# EAGLE board p8x-bustest-card (EAGLE 9.6.2)

Size 160 x 100 mm. Coordinates in mm from the lower left corner, seen from the top.
Outline: 0,0 160,0 160,100 0,100 0,0
Copper layers (1*2*15*16): Top / Route2 / Route15 / Bottom

## Footprints (pad centres in the part's own frame; a part is rotated, then mirrored left to right if it is on the bottom)
PICO40 = drill 0.813 pad 1.6: 1 0,0; 2 0,-2.54; 3 0,-5.08; 4 0,-7.62; 5 0,-10.16; 6 0,-12.7; 7 0,-15.24; 8 0,-17.78; 9 0,-20.32; 10 0,-22.86; 11 0,-25.4; 12 0,-27.94; 13 0,-30.48; 14 0,-33.02; 15 0,-35.56; 16 0,-38.1; 17 0,-40.64; 18 0,-43.18; 19 0,-45.72; 20 0,-48.26; 21 17.78,-48.26; 22 17.78,-45.72; 23 17.78,-43.18; 24 17.78,-40.64; 25 17.78,-38.1; 26 17.78,-35.56; 27 17.78,-33.02; 28 17.78,-30.48; 29 17.78,-27.94; 30 17.78,-25.4; 31 17.78,-22.86; 32 17.78,-20.32; 33 17.78,-17.78; 34 17.78,-15.24; 35 17.78,-12.7; 36 17.78,-10.16; 37 17.78,-7.62; 38 17.78,-5.08; 39 17.78,-2.54; 40 17.78,0
C_DISC1 = drill 0.9 pad 1.8: 1 0,0; 2 0,-2.54
LED5 = drill 0.9 pad 1.8: 1 2.54,0; 2 0,0
MABC96R = drill 0.914 pad 1.524: A1 -2.54,39.37; A2 -2.54,36.83; A3 -2.54,34.29; A4 -2.54,31.75; A5 -2.54,29.21; A6 -2.54,26.67; A7 -2.54,24.13; A8 -2.54,21.59; A9 -2.54,19.05; A10 -2.54,16.51; A11 -2.54,13.97; A12 -2.54,11.43; A13 -2.54,8.89; A14 -2.54,6.35; A15 -2.54,3.81; A16 -2.54,1.27; A17 -2.54,-1.27; A18 -2.54,-3.81; A19 -2.54,-6.35; A20 -2.54,-8.89; A21 -2.54,-11.43; A22 -2.54,-13.97; A23 -2.54,-16.51; A24 -2.54,-19.05; A25 -2.54,-21.59; A26 -2.54,-24.13; A27 -2.54,-26.67; A28 -2.54,-29.21; A29 -2.54,-31.75; A30 -2.54,-34.29; A31 -2.54,-36.83; A32 -2.54,-39.37; B1 0,39.37; B2 0,36.83; B3 0,34.29; B4 0,31.75; B5 0,29.21; B6 0,26.67; B7 0,24.13; B8 0,21.59; B9 0,19.05; B10 0,16.51; B11 0,13.97; B12 0,11.43; B13 0,8.89; B14 0,6.35; B15 0,3.81; B16 0,1.27; B17 0,-1.27; B18 0,-3.81; B19 0,-6.35; B20 0,-8.89; B21 0,-11.43; B22 0,-13.97; B23 0,-16.51; B24 0,-19.05; B25 0,-21.59; B26 0,-24.13; B27 0,-26.67; B28 0,-29.21; B29 0,-31.75; B30 0,-34.29; B31 0,-36.83; B32 0,-39.37; C1 2.54,39.37; C2 2.54,36.83; C3 2.54,34.29; C4 2.54,31.75; C5 2.54,29.21; C6 2.54,26.67; C7 2.54,24.13; C8 2.54,21.59; C9 2.54,19.05; C10 2.54,16.51; C11 2.54,13.97; C12 2.54,11.43; C13 2.54,8.89; C14 2.54,6.35; C15 2.54,3.81; C16 2.54,1.27; C17 2.54,-1.27; C18 2.54,-3.81; C19 2.54,-6.35; C20 2.54,-8.89; C21 2.54,-11.43; C22 2.54,-13.97; C23 2.54,-16.51; C24 2.54,-19.05; C25 2.54,-21.59; C26 2.54,-24.13; C27 2.54,-26.67; C28 2.54,-29.21; C29 2.54,-31.75; C30 2.54,-34.29; C31 2.54,-36.83; C32 2.54,-39.37 | hole 2.794: -0.3,45; -0.3,-45
HDR10 = drill 0.9 pad 1.7: 1 0,0; 2 2.54,0; 3 0,-2.54; 4 2.54,-2.54; 5 0,-5.08; 6 2.54,-5.08; 7 0,-7.62; 8 2.54,-7.62; 9 0,-10.16; 10 2.54,-10.16
R_AXIAL = drill 0.8 pad 1.6: 1 0,0; 2 10.16,0
DIP16 = drill 0.813 pad 1.6: 1 0,0; 2 0,-2.54; 3 0,-5.08; 4 0,-7.62; 5 0,-10.16; 6 0,-12.7; 7 0,-15.24; 8 0,-17.78; 9 7.62,-17.78; 10 7.62,-15.24; 11 7.62,-12.7; 12 7.62,-10.16; 13 7.62,-7.62; 14 7.62,-5.08; 15 7.62,-2.54; 16 7.62,0
DIP28N = drill 0.813 pad 1.6: 1 0,0; 2 0,-2.54; 3 0,-5.08; 4 0,-7.62; 5 0,-10.16; 6 0,-12.7; 7 0,-15.24; 8 0,-17.78; 9 0,-20.32; 10 0,-22.86; 11 0,-25.4; 12 0,-27.94; 13 0,-30.48; 14 0,-33.02; 15 7.62,-33.02; 16 7.62,-30.48; 17 7.62,-27.94; 18 7.62,-25.4; 19 7.62,-22.86; 20 7.62,-20.32; 21 7.62,-17.78; 22 7.62,-15.24; 23 7.62,-12.7; 24 7.62,-10.16; 25 7.62,-7.62; 26 7.62,-5.08; 27 7.62,-2.54; 28 7.62,0
DIP20 = drill 0.813 pad 1.6: 1 0,0; 2 0,-2.54; 3 0,-5.08; 4 0,-7.62; 5 0,-10.16; 6 0,-12.7; 7 0,-15.24; 8 0,-17.78; 9 0,-20.32; 10 0,-22.86; 11 7.62,-22.86; 12 7.62,-20.32; 13 7.62,-17.78; 14 7.62,-15.24; 15 7.62,-12.7; 16 7.62,-10.16; 17 7.62,-7.62; 18 7.62,-5.08; 19 7.62,-2.54; 20 7.62,0

## Placement (x,y rotation side)
A1  RP2040  [PICO40]  316.81,95.2 0 top  (outside the outline)
C1  100nF  [C_DISC1]  215.19,95.1 0 top  (outside the outline)
C2  100nF  [C_DISC1]  231.41,95.1 0 top  (outside the outline)
C3  100nF  [C_DISC1]  247.63,95.1 0 top  (outside the outline)
C4  100nF  [C_DISC1]  263.85,95.1 0 top  (outside the outline)
C5  100nF  [C_DISC1]  280.07,95.1 0 top  (outside the outline)
C6  100nF  [C_DISC1]  296.29,95.1 0 top  (outside the outline)
C7  100nF  [C_DISC1]  312.51,95.1 0 top  (outside the outline)
D1  SCHOTTKY  [LED5]  210.21,42.64 0 top  (outside the outline)
J1  MABC96R  [MABC96R]  193.34,49.6 0 top  (outside the outline)
J2  PROBE  [HDR10]  203.32,42.69 0 top  (outside the outline)
LED1  PRB0  [LED5]  20,88 0 top
LED2  PRB1  [LED5]  37,88 0 top
LED3  PRB2  [LED5]  54,88 0 top
LED4  PRB3  [LED5]  71,88 0 top
LED5  PRB4  [LED5]  88,88 0 top
LED6  PRB5  [LED5]  105,88 0 top
LED7  PRB6  [LED5]  122,88 0 top
LED8  PRB7  [LED5]  139,88 0 top
LED9  5V  [LED5]  20,76 0 top
LED10  ARM  [LED5]  37,76 0 top
LED11  LIS  [LED5]  54,76 0 top
LED12  CLK  [LED5]  71,76 0 top
LED13  CKB  [LED5]  88,76 0 top
LED14  RES  [LED5]  105,76 0 top
LED15  ERR  [LED5]  122,76 0 top
LED16  USB  [LED5]  139,76 0 top
R5  10K  [R_AXIAL]  217.05,42.74 0 top  (outside the outline)
R6  10K  [R_AXIAL]  231.41,42.74 0 top  (outside the outline)
R7  1K8  [R_AXIAL]  245.77,42.74 0 top  (outside the outline)
R8  3K3  [R_AXIAL]  260.13,42.74 0 top  (outside the outline)
RN1  8x330R  [DIP16]  274.49,42.74 0 top  (outside the outline)
RN2  8x330R  [DIP16]  286.31,42.74 0 top  (outside the outline)
RN3  8x1K  [DIP16]  298.13,42.74 0 top  (outside the outline)
U1  MCP23S17  [DIP28N]  203.27,95.2 0 top  (outside the outline)
U2  MCP23S17  [DIP28N]  219.49,95.2 0 top  (outside the outline)
U3  MCP23S17  [DIP28N]  235.71,95.2 0 top  (outside the outline)
U4  MCP23S17  [DIP28N]  251.93,95.2 0 top  (outside the outline)
U5  MCP23S17  [DIP28N]  268.15,95.2 0 top  (outside the outline)
U6  74HCT244  [DIP20]  284.37,95.2 0 top  (outside the outline)
U7  74HCT244  [DIP20]  300.59,95.2 0 top  (outside the outline)

## Library data of the parts
A1 C1-C7 D1 J1 J2 LED1-LED16 R5-R8 RN1-RN3 U1-U7 = p8x

## Nets
-IRQ: U4.27
-RES: J1.A11 U3.28
A0: J1.C3 U1.1
A1: J1.C4 U1.2
A2: J1.C5 U1.3
A3: J1.C6 U1.4
A4: J1.C7 U1.5
A5: J1.C8 U1.6
A6: J1.C9 U1.7
A7: J1.C10 U1.8
A8: J1.C11 U2.21
A9: J1.C12 U2.22
A10: J1.C13 U2.23
A11: J1.C14 U2.24
A12: J1.C15 U2.25
A13: J1.C16 U2.26
A14: J1.C17 U2.27
A15: J1.C18 U2.28
ALUM: J1.C23 U3.5
ALUS0: J1.C19 U3.1
ALUS1: J1.C20 U3.2
ALUS2: J1.C21 U3.3
ALUS3: J1.C22 U3.4
BSEL: J1.B28 U4.25
CIN: J1.C24 U3.6
CLK: J1.A24 U3.26
CLKB: J1.A25 U3.27
CLRC: J1.B27 U4.24
CS5: U1.11 U2.11 U3.11 U4.11 U5.11 U6.14
D0: J1.A3 U1.21
D1: J1.A4 U1.22
D2: J1.A5 U1.23
D3: J1.A6 U1.24
D4: J1.A7 U1.25
D5: J1.A8 U1.26
D6: J1.A9 U1.27
D7: J1.A10 U1.28
DLD0: J1.A16 U2.5
DLD1: J1.A17 U2.6
DLD2: J1.A18 U2.7
DLD3: J1.A19 U2.8
DOE0: J1.A12 U2.1
DOE1: J1.A13 U2.2
DOE2: J1.A14 U2.3
DOE3: J1.A15 U2.4
FC: J1.A27 U4.1
FN: J1.A29 U4.3
FV: J1.A30 U4.4
FZ: J1.A28 U4.2
GND: A1.3 A1.33 C1.2 C2.2 C3.2 C4.2 C5.2 C6.2 C7.2 J1.A31 J1.A32 J1.B3 J1.B5 J1.B7 J1.B9 J1.B11 J1.B13 J1.B15 J1.B17 J1.B19 J1.B21 J1.B23 J1.B25 J1.B31 J1.B32 J1.C31 J1.C32 J2.9 J2.10 LED1.1 LED2.1 LED3.1 LED4.1 LED5.1 LED6.1 LED7.1 LED8.1 LED9.1 LED10.1 LED11.1 LED12.1 LED13.1 LED14.1 LED15.1 LED16.1 R6.2 R8.2 U1.10 U1.15 U1.16 U1.17 U1.19 U1.20 U2.10 U2.16 U2.17 U2.19 U2.20 U3.10 U3.15 U3.17 U3.19 U3.20 U4.10 U4.17 U4.19 U4.20 U5.10 U5.15 U5.16 U5.19 U5.20 U6.1 U6.10 U6.11 U6.13 U6.15 U6.17 U6.19 U7.1 U7.10 U7.19
L_PR0: RN1.1 U7.18
L_PR1: RN1.2 U7.16
L_PR2: RN1.3 U7.14
L_PR3: RN1.4 U7.12
L_PR4: RN1.5 U7.9
L_PR5: RN1.6 U7.7
L_PR6: RN1.7 U7.5
L_PR7: RN1.8 U7.3
LDF: J1.A26 U4.21
LDZN: J1.C28 U4.22
LK_PR0: LED1.2 RN1.16
LK_PR1: LED2.2 RN1.15
LK_PR2: LED3.2 RN1.14
LK_PR3: LED4.2 RN1.13
LK_PR4: LED5.2 RN1.12
LK_PR5: LED6.2 RN1.11
LK_PR6: LED7.2 RN1.10
LK_PR7: LED8.2 RN1.9
P5V: A1.39 D1.1
P_CS: A1.7 U6.6
P_MISO: A1.6 R7.2 R8.1
P_RST: A1.9 U6.8
P_SCK: A1.4 U6.2
P_SI: A1.5 U6.4
PDEC: J1.A23 U3.25
PINC: J1.A22 U3.24
PR0: RN3.1 U5.21 U7.2
PR1: RN3.2 U5.22 U7.4
PR2: RN3.3 U5.23 U7.6
PR3: RN3.4 U5.24 U7.8
PR4: RN3.5 U5.25 U7.11
PR5: RN3.6 U5.26 U7.13
PR6: RN3.7 U5.27 U7.15
PR7: RN3.8 U5.28 U7.17
PRJ0: J2.1 RN3.16
PRJ1: J2.2 RN3.15
PRJ2: J2.3 RN3.14
PRJ3: J2.4 RN3.13
PRJ4: J2.5 RN3.12
PRJ5: J2.6 RN3.11
PRJ6: J2.7 RN3.10
PRJ7: J2.8 RN3.9
PSEL0: J1.A20 U3.21
PSEL1: J1.A21 U3.22
PSEL2: J1.C27 U3.23
RST5: U1.18 U2.18 U3.18 U4.18 U5.18 U6.12
SCK5: U1.12 U2.12 U3.12 U4.12 U5.12 U6.18
SENSE5: A1.31 R5.2 R6.1
SETC: J1.C30 U4.23
SH0: J1.C25 U3.7
SH1: J1.C26 U3.8
SHCIN: J1.C29 U4.26
SI5: U1.13 U2.13 U3.13 U4.13 U5.13 U6.16
SO5: R7.1 U1.14 U2.14 U3.14 U4.14 U5.14
SPARE12: U5.1
SPARE13: U5.2
SPARE14: U5.3
SPARE15: U5.4
SPARE16: U5.5
SPARE17: U5.6
ST0: A1.10 RN2.1
ST1: A1.11 RN2.2
ST2: A1.12 RN2.3
ST3: A1.14 RN2.4
ST4: A1.15 RN2.5
ST5: A1.16 RN2.6
ST6: A1.17 RN2.7
ST7: A1.19 RN2.8
STK0: LED9.2 RN2.16
STK1: LED10.2 RN2.15
STK2: LED11.2 RN2.14
STK3: LED12.2 RN2.13
STK4: LED13.2 RN2.12
STK5: LED14.2 RN2.11
STK6: LED15.2 RN2.10
STK7: LED16.2 RN2.9
VCC: C1.1 C2.1 C3.1 C4.1 C5.1 C6.1 C7.1 D1.2 J1.A1 J1.A2 J1.B1 J1.B2 J1.C1 J1.C2 R5.1 U1.9 U2.9 U2.15 U3.9 U3.16 U4.9 U4.15 U4.16 U5.9 U5.17 U6.20 U7.20

## Text on the board
tPlace: P8X Bus Test Card V1.0